# Altium PCB PCB1.PcbDoc (part 2 of 3)
Units mm, origin at the board's own origin, x right, y up, seen from the top; angles counter-clockwise.
Board outline 15.82 x 56.9 mm, 4 copper layers (Top Layer, Layer 1, Layer 2, Bottom Layer), stack 0.576 mm thick; 45 components, 31 nets, 148 pads, 202 vias.
Unrouted connection lines stored in the file: 3.
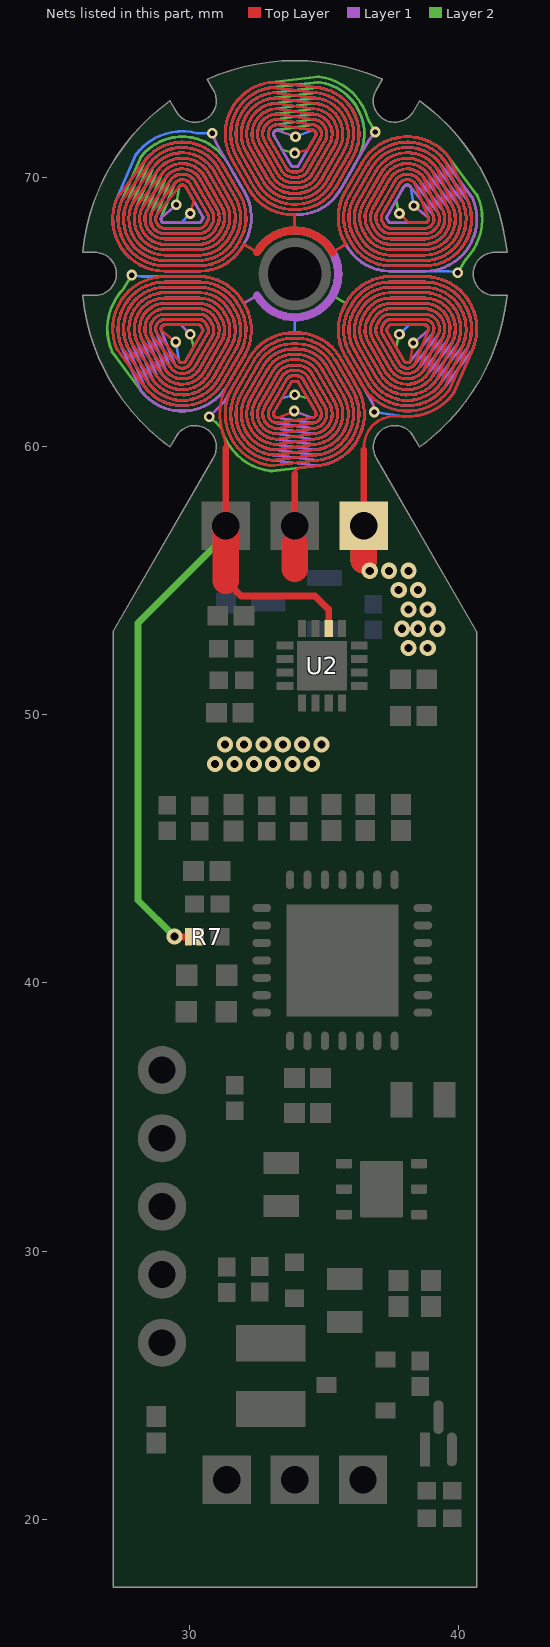
[diagram p4: the nets of this part, all layers, seen from the top]

## Via types
v1: diameter 0.6, hole 0.3, Top Layer to Bottom Layer, tented both sides, 160 vias
v2: diameter 0.5, hole 0.2, Top Layer to Bottom Layer, tented bottom, 20 vias
v3: diameter 0.4, hole 0.2, Top Layer to Bottom Layer, tented both sides, 18 vias
v4: diameter 0.5, hole 0.3, Top Layer to Bottom Layer, tented bottom, 4 vias

## Nets (pads, with @x,y where several pads share a name; then routed paths per layer and width w, separated by ;. In a path a pad name is that pad's centre, name@x,y a point inside that pad or via, vN(x,y) a via of type N, cw(c..) or ccw(c..) an arc to the next point about the centre after c; other vN are vias at no path point) (continued)
NetR7_2: pad.@36.479,57.031 R7.2 U2.10 | length 2482.2
  Top Layer w0.1: 28.319,70.634 27.281,69.232 ccw(c29.07,68.467) 29.07,66.521 30.384,66.521 ccw(c30.346,68.394) 32.004,67.521 32.463,67.256 ; 28.319,70.634 cw(c29.718,69.589) 31.23,70.462 31.889,69.319 cw(c30.419,68.52) 31.831,67.621 cw(c30.346,68.394) 30.389,66.721 29.07,66.721 cw(c29.07,68.467) 27.466,69.156 28.466,70.496 cw(c29.718,69.589) 31.056,70.362 31.718,69.215 cw(c30.419,68.52) 31.705,67.801 ; 28.934,64.321 cw(c29.07,64.375) 29.07,64.521 30.346,64.521 cw(c30.346,64.448) 30.41,64.484 ; 28.939,64.308 v3(29.47,63.887) ; v3(30.012,68.671) 30.14,69.149 29.844,69.662 ccw(c29.718,69.589) 29.603,69.679 29.595,69.668 28.757,68.614 ccw(c29.07,68.467) 29.07,68.121 30.346,68.121 ccw(c30.346,68.394) 30.578,68.25 ; 30.413,64.477 ccw(c30.346,64.448) 30.41,64.483 30.445,64.421 30.482,64.359 ; 30.477,64.366 cw(c30.419,64.322) 30.482,64.359 ; 30.578,64.592 ccw(c33.909,66.421) 30.618,64.521 ccw(c33.909,66.421) 30.66,64.45 ; 30.591,64.568 ccw(c30.346,64.448) 30.578,64.592 ccw(c30.346,64.448) 30.346,64.721 29.07,64.721 ccw(c29.07,64.375) 28.757,64.228 29.595,63.174 29.603,63.163 ccw(c29.718,63.253) 29.844,63.18 30.482,64.286 ccw(c30.419,64.322) 30.482,64.359 ; 30.591,68.274 cw(c30.346,68.394) 30.578,68.25 ; 30.645,64.474 cw(c30.419,64.322) 30.66,64.45 ; 30.645,68.368 ccw(c30.419,68.52) 30.66,68.392 ; 30.751,64.693 ccw(c33.909,66.421) 30.791,64.621 ccw(c33.909,66.421) 30.833,64.55 ; 30.768,64.661 ccw(c30.346,64.448) 30.751,64.693 ccw(c30.346,64.448) 30.346,64.921 29.113,64.921 ccw(c29.07,64.375) 28.583,64.123 29.434,63.056 ccw(c29.718,63.253) 30.017,63.08 30.655,64.186 ccw(c30.419,64.322) 30.66,64.45 ; 30.768,68.181 cw(c30.346,68.394) 30.751,68.149 ; 30.815,64.581 cw(c30.419,64.322) 30.833,64.55 ; 30.815,68.261 ccw(c30.419,68.52) 30.833,68.292 ; 30.945,64.756 ccw(c30.346,64.448) 30.925,64.792 ; 30.945,68.086 cw(c30.346,68.394) 30.925,68.05 ; 30.985,64.686 cw(c30.419,64.322) 31.006,64.651 cw(c30.419,64.322) 31.002,63.986 30.364,62.88 cw(c29.718,63.253) 29.095,62.842 28.224,63.952 cw(c29.07,64.375) 29.063,65.321 30.346,65.321 cw(c30.346,64.448) 31.121,64.851 ; 30.985,68.156 ccw(c30.419,68.52) 31.006,68.191 ; 31.006,64.651 cw(c33.909,66.421) 30.965,64.721 cw(c33.909,66.421) 30.925,64.792 ; 31.099,64.891 ccw(c33.909,66.421) 31.138,64.821 ccw(c33.909,66.421) 31.179,64.752 ; 31.099,67.951 cw(c33.909,66.421) 31.138,68.021 cw(c33.909,66.421) 31.179,68.09 ; 31.121,67.991 cw(c30.346,68.394) 30.346,67.521 29.063,67.521 cw(c29.07,68.467) 28.224,68.89 29.095,70 cw(c29.718,69.589) 30.364,69.962 31.002,68.856 cw(c30.419,68.52) 31.006,68.191 ; 31.155,64.791 cw(c30.419,64.322) 31.175,63.886 30.533,62.774 cw(c29.718,63.253) 28.928,62.732 28.045,63.862 cw(c29.07,64.375) 29.07,65.521 30.346,65.521 cw(c30.346,64.448) 31.273,64.989 ; 31.155,68.051 ccw(c30.419,68.52) 31.175,68.956 30.533,70.068 ccw(c29.718,69.589) 28.928,70.11 28.045,68.98 ccw(c29.07,68.467) 29.07,67.321 30.346,67.321 ccw(c30.346,68.394) 31.273,67.853 ; 31.189,60.652 cw(c33.261,61.207) 31.403,62.28 31.823,63.008 32.06,63.418 ccw(c30.419,64.322) 32.004,65.321 ; 31.193,60.636 31.25,60.4 cw(c30.184,59.969) 31.334,59.938 ; 32.044,65.254 cw(c33.909,66.421) 32.004,65.321 ; 33.241,61.063 cw(c33.261,61.207) 33.135,61.28 33.773,62.386 cw(c33.836,62.349) 33.837,62.422 ; 33.247,61.062 33.285,61.062 v3(33.884,61.31) ; 33.829,63.222 ccw(c33.909,66.421) 33.909,63.221 ccw(c33.909,66.421) 33.989,63.222 ; 33.829,69.62 cw(c33.909,66.421) 33.909,69.621 cw(c33.909,66.421) 33.989,69.62 ; 33.845,62.422 ccw(c33.836,62.349) 33.838,62.422 ; 33.855,62.621 ccw(c33.836,62.349) 33.827,62.622 ; 33.855,70.221 cw(c33.836,70.493) 33.827,70.22 ; 33.863,62.821 ccw(c33.836,62.349) 33.827,62.822 ; 33.863,70.021 cw(c33.836,70.493) 33.827,70.02 ; 33.869,63.021 ccw(c33.836,62.349) 33.827,63.022 ; 33.869,69.821 cw(c33.836,70.493) 33.827,69.82 ; 33.875,63.221 ccw(c33.836,62.349) 33.08,62.786 32.439,61.674 ccw(c33.261,61.207) 33.205,60.263 34.601,60.463 ccw(c34.557,61.207) 35.203,61.58 34.565,62.686 ccw(c33.982,62.349) 33.991,63.022 ; 33.875,69.621 cw(c33.836,70.493) 33.08,70.056 32.439,71.168 cw(c33.261,71.635) 33.205,72.579 34.601,72.379 cw(c34.557,71.635) 35.203,71.262 34.565,70.156 cw(c33.982,70.493) 33.991,69.82 ; 33.909,58.974 cw(c34.136,58.974) 34.136,59.2 34.789,59.275 ccw(c34.557,61.207) 36.242,62.18 35.822,62.908 35.585,63.318 ccw(c33.982,62.349) 33.909,64.221 ; 33.909,68.091 33.909,68.621 cw(c33.836,70.493) 32.233,69.524 31.996,69.934 31.576,70.662 cw(c33.261,71.635) 33.029,73.567 34.762,73.369 ; v3(33.909,70.921) 34.387,71.049 34.683,71.562 ccw(c34.557,71.635) 34.577,71.779 34.564,71.781 33.232,71.979 ccw(c33.261,71.635) 32.962,71.462 33.6,70.356 ccw(c33.836,70.493) 33.827,70.22 ; 33.943,63.221 cw(c33.982,62.349) 34.738,62.786 35.379,61.674 cw(c34.557,61.207) 34.613,60.263 33.194,60.063 cw(c33.261,61.207) 32.269,61.78 32.907,62.886 cw(c33.836,62.349) 33.831,63.422 ; 33.943,69.621 ccw(c33.982,70.493) 34.738,70.056 35.379,71.168 ccw(c34.557,71.635) 34.613,72.579 33.194,72.779 ccw(c33.261,71.635) 32.269,71.062 32.907,69.956 ccw(c33.836,70.493) 33.831,69.42 ; 33.949,63.021 cw(c33.982,62.349) 33.991,63.022 ; 33.949,69.821 ccw(c33.982,70.493) 33.991,69.82 ; 33.955,62.821 cw(c33.982,62.349) 33.991,62.822 ; 33.955,70.021 ccw(c33.982,70.493) 33.991,70.02 ; 33.963,62.621 cw(c33.982,62.349) 33.991,62.622 ; 33.963,70.221 ccw(c33.982,70.493) 33.991,70.22 ; 33.973,62.422 cw(c33.982,62.349) 33.98,62.422 ; 33.988,64.222 cw(c33.909,66.421) 33.909,64.221 ; 34.762,59.473 33.029,59.275 cw(c33.261,61.207) 31.576,62.18 31.996,62.908 32.233,63.318 cw(c33.836,62.349) 33.909,64.221 ; 34.763,59.473 ccw(c34.557,61.207) 36.069,62.08 35.409,63.223 ccw(c33.982,62.349) 33.909,64.021 ccw(c33.836,62.349) 32.409,63.223 31.749,62.08 ccw(c33.261,61.207) 33.056,59.473 34.716,59.67 ccw(c34.557,61.207) 35.895,61.98 35.234,63.127 ccw(c33.982,62.349) 34.002,63.823 ; 34.763,73.369 cw(c34.557,71.635) 36.069,70.762 35.409,69.619 cw(c33.982,70.493) 33.909,68.821 cw(c33.836,70.493) 32.409,69.619 31.749,70.762 cw(c33.261,71.635) 33.056,73.369 34.716,73.172 cw(c34.557,71.635) 35.895,70.862 35.234,69.715 cw(c33.982,70.493) 34.002,69.019 ; 35.355,67.256 35.814,67.521 cw(c37.399,68.52) 35.758,69.424 35.995,69.834 36.415,70.562 cw(c38.1,69.589) 39.658,70.756 40.352,69.156 cw(c38.748,68.467) 38.748,66.721 37.429,66.721 cw(c37.472,68.394) 35.987,67.621 cw(c37.399,68.52) 35.929,69.319 36.588,70.462 cw(c38.1,69.589) 39.499,70.634 40.159,69.098 cw(c38.748,68.467) 38.748,66.921 37.424,66.921 cw(c37.472,68.394) 36.206,67.64 ; 35.852,65.39 cw(c33.909,66.421) 35.814,65.321 ; 36.489,59.866 cw(c37.634,59.969) 37.72,61.116 38.09,61.107 ccw(c38.1,63.253) 39.832,61.986 ; 36.639,64.752 ccw(c33.909,66.421) 36.68,64.821 ccw(c33.909,66.421) 36.719,64.891 ; 36.639,68.09 cw(c33.909,66.421) 36.68,68.021 cw(c33.909,66.421) 36.719,67.951 ; 36.663,64.791 ccw(c37.399,64.322) 36.643,63.886 37.285,62.774 ; 36.663,68.051 cw(c37.399,68.52) 36.643,68.956 37.285,70.068 cw(c38.1,69.589) 38.89,70.11 39.415,68.801 cw(c38.748,68.467) 38.748,67.721 37.472,67.721 cw(c37.472,68.394) 36.893,68.05 ; 36.697,64.851 cw(c37.472,64.448) 37.472,65.321 38.755,65.321 cw(c38.748,64.375) 39.594,63.952 39.057,62.623 cw(c38.1,63.253) 37.108,62.68 36.47,63.786 cw(c37.399,64.322) 36.467,64.854 ; 36.697,67.991 ccw(c37.472,68.394) 37.472,67.521 38.755,67.521 ccw(c38.748,68.467) 39.594,68.89 39.057,70.219 ccw(c38.1,69.589) 37.108,70.162 36.47,69.056 ccw(c37.399,68.52) 36.467,67.988 ; 36.812,64.651 ccw(c33.909,66.421) 36.853,64.721 ccw(c33.909,66.421) 36.893,64.792 ; 36.833,64.686 ccw(c37.399,64.322) 36.812,64.651 ccw(c37.399,64.322) 36.816,63.986 37.454,62.88 ccw(c38.1,63.253) 38.723,62.842 39.235,64.123 ccw(c38.748,64.375) 38.705,64.921 37.472,64.921 ccw(c37.472,64.448) 37.067,64.693 ccw(c37.472,64.448) 37.05,64.661 ; 36.833,68.156 cw(c37.399,68.52) 36.812,68.191 ; 36.873,64.756 cw(c37.472,64.448) 36.893,64.792 ; 36.873,68.086 ccw(c37.472,68.394) 36.893,68.05 ; 37.003,64.581 ccw(c37.399,64.322) 36.985,64.55 ; 37.003,68.261 cw(c37.399,68.52) 36.985,68.292 ; 37.05,68.181 ccw(c37.472,68.394) 37.067,68.149 ; 37.067,64.693 cw(c33.909,66.421) 37.027,64.621 cw(c33.909,66.421) 36.985,64.55 ; 37.173,64.474 ccw(c37.399,64.322) 37.158,64.45 ; 37.173,68.368 cw(c37.399,68.52) 37.158,68.392 ; 37.227,64.568 cw(c37.472,64.448) 37.24,64.592 cw(c37.472,64.448) 37.472,64.721 38.748,64.721 cw(c38.748,64.375) 39.061,64.228 38.562,62.958 cw(c38.1,63.253) 37.606,63.018 36.989,64.086 cw(c37.399,64.322) 36.985,64.55 ; 37.227,68.274 ccw(c37.472,68.394) 37.24,68.25 ccw(c37.472,68.394) 37.472,68.121 38.748,68.121 ccw(c38.748,68.467) 39.061,68.614 38.562,69.884 ccw(c38.1,69.589) 37.606,69.824 36.989,68.756 ccw(c37.399,68.52) 36.985,68.292 ; 37.24,64.592 cw(c33.909,66.421) 37.2,64.521 cw(c33.909,66.421) 37.158,64.45 ; 37.24,68.25 ccw(c33.909,66.421) 37.2,68.321 ccw(c33.909,66.421) 37.158,68.392 ; 37.285,62.774 ccw(c38.1,63.253) 38.89,62.732 39.415,64.041 ccw(c38.748,64.375) 38.748,65.121 37.472,65.121 ccw(c37.472,64.448) 36.893,64.792 ; 37.341,64.366 ccw(c37.399,64.322) 37.336,64.359 ; 37.405,64.477 cw(c37.472,64.448) 37.408,64.483 37.373,64.421 37.336,64.359 ; 37.408,64.484 cw(c37.472,64.448) 37.472,64.521 38.748,64.521 cw(c38.748,64.375) 38.884,64.321 38.879,64.308 38.384,63.056 cw(c38.1,63.253) 37.801,63.08 37.163,64.186 cw(c37.399,64.322) 37.158,64.45 ; 37.429,66.321 37.434,66.321 ; v3(37.806,68.671) 38.156,68.321 38.748,68.321 ccw(c38.748,68.467) 38.884,68.521 38.879,68.534 38.384,69.786 ccw(c38.1,69.589) 37.801,69.762 37.163,68.656 ccw(c37.399,68.52) 37.158,68.392 ; v3(38.323,63.844) 38.215,63.163 cw(c38.1,63.253) 37.974,63.18 37.336,64.286 cw(c37.399,64.322) 37.336,64.359 ; 39.823,61.964 39.832,61.986 ; 39.853,62.015 cw(c38.1,63.253) 39.832,61.986 ; 30.578,68.25 cw(c33.909,66.421) 30.618,68.321 cw(c33.909,66.421) 30.66,68.392 ; 30.66,68.392 ccw(c30.419,68.52) 30.655,68.656 30.017,69.762 ccw(c29.718,69.589) 29.434,69.786 28.583,68.719 ccw(c29.07,68.467) 29.113,67.921 30.346,67.921 ccw(c30.346,68.394) 30.751,68.149 ; 30.751,68.149 cw(c33.909,66.421) 30.791,68.221 cw(c33.909,66.421) 30.833,68.292 ; 30.833,64.55 cw(c30.419,64.322) 30.829,64.086 30.212,63.018 cw(c29.718,63.253) 29.256,62.958 28.403,64.041 cw(c29.07,64.375) 29.07,65.121 30.346,65.121 cw(c30.346,64.448) 30.925,64.792 ; 30.833,68.292 ccw(c30.419,68.52) 30.829,68.756 30.212,69.824 ccw(c29.718,69.589) 29.256,69.884 28.403,68.801 ccw(c29.07,68.467) 29.07,67.721 30.346,67.721 ccw(c30.346,68.394) 30.925,68.05 ; 30.925,68.05 cw(c33.909,66.421) 30.965,68.121 cw(c33.909,66.421) 31.006,68.191 ; 31.273,64.989 ccw(c33.909,66.421) 31.297,64.946 ; 31.273,64.989 cw(c30.346,64.448) 31.297,64.946 ; 31.273,67.853 ccw(c30.346,68.394) 31.297,67.896 ; 31.273,67.853 cw(c33.909,66.421) 31.297,67.896 ; 31.297,64.946 ccw(c33.909,66.421) 31.311,64.921 ccw(c33.909,66.421) 31.326,64.896 ; 31.297,67.896 cw(c33.909,66.421) 31.311,67.921 cw(c33.909,66.421) 31.326,67.946 ; 31.326,64.896 ccw(c33.909,66.421) 31.351,64.854 ; 31.326,64.896 cw(c30.419,64.322) 31.351,64.854 ; 31.326,67.946 cw(c33.909,66.421) 31.351,67.988 ; 31.326,67.946 ccw(c30.419,68.52) 31.351,67.988 ; 31.351,64.854 cw(c30.419,64.322) 31.348,63.786 30.71,62.68 cw(c29.718,63.253) 28.761,62.623 27.853,63.8 cw(c29.07,64.375) 29.07,65.721 30.398,65.721 cw(c30.346,64.448) 31.436,65.109 ccw(c33.909,66.421) 31.484,65.021 cw(c30.419,64.322) 31.547,63.73 30.883,62.58 cw(c29.718,63.253) 28.611,62.487 27.659,63.744 cw(c29.07,64.375) 29.07,65.921 30.394,65.921 cw(c30.346,64.448) 31.612,65.202 ccw(c33.909,66.421) 31.657,65.121 ; 31.351,67.988 ccw(c30.419,68.52) 31.348,69.056 30.71,70.162 ccw(c29.718,69.589) 28.761,70.219 27.853,69.042 ccw(c29.07,68.467) 29.07,67.121 30.398,67.121 ccw(c30.346,68.394) 31.436,67.733 cw(c33.909,66.421) 31.484,67.821 ccw(c30.419,68.52) 31.547,69.112 30.883,70.262 ccw(c29.718,69.589) 28.611,70.355 27.659,69.098 ccw(c29.07,68.467) 29.07,66.921 30.394,66.921 ccw(c30.346,68.394) 31.612,67.64 cw(c33.909,66.421) 31.657,67.721 ; 31.657,65.121 ccw(c33.909,66.421) 31.705,65.041 ; 31.657,65.121 cw(c30.419,64.322) 31.705,65.041 ; 31.657,67.721 ccw(c30.419,68.52) 31.705,67.801 ; 31.657,67.721 cw(c33.909,66.421) 31.705,67.801 ; 31.705,65.041 cw(c30.419,64.322) 31.718,63.627 31.056,62.48 cw(c29.718,63.253) 28.466,62.346 27.466,63.686 cw(c29.07,64.375) 29.07,66.121 30.389,66.121 cw(c30.346,64.448) 31.831,65.221 cw(c30.419,64.322) 31.889,63.523 31.23,62.38 cw(c29.718,63.253) 28.319,62.208 27.281,63.61 cw(c29.07,64.375) 29.07,66.321 30.384,66.321 cw(c30.346,64.448) 32.004,65.321 ; 33.827,62.622 ccw(c33.909,66.421) 33.909,62.621 ccw(c33.909,66.421) 33.991,62.622 ; 33.827,62.622 ccw(c33.836,62.349) 33.6,62.486 32.962,61.38 ccw(c33.261,61.207) 33.232,60.863 34.564,61.061 34.577,61.063 ccw(c34.557,61.207) 34.683,61.28 34.045,62.386 ccw(c33.982,62.349) 33.981,62.422 ; 33.827,62.822 ccw(c33.909,66.421) 33.909,62.821 ccw(c33.909,66.421) 33.991,62.822 ; 33.827,62.822 ccw(c33.836,62.349) 33.427,62.586 32.81,61.518 ccw(c33.261,61.207) 33.236,60.66 34.586,60.863 ccw(c34.557,61.207) 34.856,61.38 34.218,62.486 ccw(c33.982,62.349) 33.991,62.622 ; 33.827,63.022 ccw(c33.909,66.421) 33.909,63.021 ccw(c33.909,66.421) 33.991,63.022 ; 33.827,63.022 ccw(c33.836,62.349) 33.253,62.686 32.615,61.58 ccw(c33.261,61.207) 33.217,60.463 34.582,60.66 ccw(c34.557,61.207) 35.008,61.518 34.391,62.586 ccw(c33.982,62.349) 33.991,62.822 ; 33.827,69.82 cw(c33.909,66.421) 33.909,69.821 cw(c33.909,66.421) 33.991,69.82 ; 33.827,69.82 cw(c33.836,70.493) 33.253,70.156 32.615,71.262 cw(c33.261,71.635) 33.217,72.379 34.582,72.182 cw(c34.557,71.635) 35.008,71.324 34.391,70.256 cw(c33.982,70.493) 33.991,70.02 ; 33.827,70.02 cw(c33.836,70.493) 33.427,70.256 32.81,71.324 cw(c33.261,71.635) 33.236,72.182 34.586,71.979 cw(c34.557,71.635) 34.856,71.462 34.218,70.356 cw(c33.982,70.493) 33.991,70.22 ; 33.827,70.02 cw(c33.909,66.421) 33.909,70.021 cw(c33.909,66.421) 33.991,70.02 ; 33.827,70.22 cw(c33.909,66.421) 33.909,70.221 cw(c33.909,66.421) 33.991,70.22 ; 33.831,63.422 cw(c33.836,62.349) 33.88,63.421 ; 33.831,63.422 ccw(c33.909,66.421) 33.88,63.421 ; 33.831,69.42 ccw(c33.836,70.493) 33.88,69.421 ; 33.831,69.42 cw(c33.909,66.421) 33.88,69.421 ; 33.838,62.422 33.909,62.421 33.98,62.422 ; 33.88,63.421 ccw(c33.909,66.421) 33.909,63.421 ccw(c33.909,66.421) 33.938,63.421 ; 33.88,69.421 cw(c33.909,66.421) 33.909,69.421 cw(c33.909,66.421) 33.938,69.421 ; 33.909,63.821 cw(c33.982,62.349) 34.002,63.823 ; 33.909,63.821 ccw(c33.909,66.421) 34.002,63.823 ; 33.909,63.821 cw(c33.909,66.421) 33.816,63.823 ccw(c33.836,62.349) 32.584,63.127 31.923,61.98 ccw(c33.261,61.207) 33.102,59.67 34.667,59.866 ccw(c34.557,61.207) 35.722,61.88 35.058,63.03 ccw(c33.982,62.349) 33.909,63.621 cw(c33.909,66.421) 33.809,63.623 ccw(c33.836,62.349) 32.76,63.03 32.096,61.88 ccw(c33.261,61.207) 33.151,59.866 34.624,60.063 ccw(c34.557,61.207) 35.549,61.78 34.911,62.886 ccw(c33.982,62.349) 33.987,63.422 ; 33.909,69.021 cw(c33.909,66.421) 34.002,69.019 ; 33.909,69.021 ccw(c33.982,70.493) 34.002,69.019 ; 33.909,69.021 ccw(c33.909,66.421) 33.816,69.019 cw(c33.836,70.493) 32.584,69.715 31.923,70.862 cw(c33.261,71.635) 33.102,73.172 34.667,72.976 cw(c34.557,71.635) 35.722,70.962 35.058,69.812 cw(c33.982,70.493) 33.909,69.221 ccw(c33.909,66.421) 33.809,69.219 cw(c33.836,70.493) 32.76,69.812 32.096,70.962 cw(c33.261,71.635) 33.151,72.976 34.624,72.779 cw(c34.557,71.635) 35.549,71.062 34.911,69.956 cw(c33.982,70.493) 33.987,69.42 ; 33.938,63.421 cw(c33.982,62.349) 33.987,63.422 ; 33.938,63.421 ccw(c33.909,66.421) 33.987,63.422 ; 33.938,69.421 cw(c33.909,66.421) 33.987,69.42 ; 33.938,69.421 ccw(c33.982,70.493) 33.987,69.42 ; 35.814,65.321 cw(c37.472,64.448) 37.429,66.321 cw(c37.472,64.448) 37.434,66.321 ; 35.814,65.321 ccw(c37.399,64.322) 35.758,63.418 35.995,63.008 36.415,62.28 ccw(c38.1,63.253) 39.658,62.086 40.352,63.686 ccw(c38.748,64.375) 38.748,66.121 37.429,66.121 ccw(c37.472,64.448) 35.987,65.221 ccw(c37.399,64.322) 35.929,63.523 36.588,62.38 ccw(c38.1,63.253) 39.499,62.208 40.159,63.744 ccw(c38.748,64.375) 38.748,65.921 37.424,65.921 ccw(c37.472,64.448) 36.206,65.202 ; 36.161,65.121 cw(c37.472,64.448) 36.206,65.202 ; 36.161,65.121 ccw(c33.909,66.421) 36.206,65.202 ; 36.161,65.121 cw(c33.909,66.421) 36.113,65.041 ccw(c37.399,64.322) 36.1,63.627 36.762,62.48 ccw(c38.1,63.253) 39.352,62.346 39.965,63.8 ccw(c38.748,64.375) 38.748,65.721 37.42,65.721 ccw(c37.472,64.448) 36.334,65.021 cw(c33.909,66.421) 36.282,64.935 ccw(c37.399,64.322) 36.271,63.73 36.935,62.58 ccw(c38.1,63.253) 39.207,62.487 39.773,63.862 ccw(c38.748,64.375) 38.748,65.521 37.472,65.521 ccw(c37.472,64.448) 36.545,64.989 ; 36.161,67.721 cw(c33.909,66.421) 36.206,67.64 ; 36.161,67.721 ccw(c37.472,68.394) 36.206,67.64 ; 36.161,67.721 ccw(c33.909,66.421) 36.113,67.801 cw(c37.399,68.52) 36.1,69.215 36.762,70.362 cw(c38.1,69.589) 39.352,70.496 39.965,69.042 cw(c38.748,68.467) 38.748,67.121 37.42,67.121 cw(c37.472,68.394) 36.334,67.821 ccw(c33.909,66.421) 36.282,67.907 cw(c37.399,68.52) 36.271,69.112 36.935,70.262 cw(c38.1,69.589) 39.207,70.355 39.773,68.98 cw(c38.748,68.467) 38.748,67.321 37.472,67.321 cw(c37.472,68.394) 36.545,67.853 ; 36.467,64.854 cw(c37.399,64.322) 36.492,64.896 ; 36.467,64.854 ccw(c33.909,66.421) 36.492,64.896 ; 36.467,67.988 ccw(c37.399,68.52) 36.492,67.946 ; 36.467,67.988 cw(c33.909,66.421) 36.492,67.946 ; 36.492,64.896 ccw(c33.909,66.421) 36.507,64.921 ccw(c33.909,66.421) 36.521,64.946 ; 36.492,67.946 cw(c33.909,66.421) 36.507,67.921 cw(c33.909,66.421) 36.521,67.896 ; 36.521,64.946 ccw(c33.909,66.421) 36.545,64.989 ; 36.521,64.946 cw(c37.472,64.448) 36.545,64.989 ; 36.521,67.896 ccw(c37.472,68.394) 36.545,67.853 ; 36.521,67.896 cw(c33.909,66.421) 36.545,67.853 ; 36.812,68.191 cw(c33.909,66.421) 36.853,68.121 cw(c33.909,66.421) 36.893,68.05 ; 36.812,68.191 cw(c37.399,68.52) 36.816,68.856 37.454,69.962 cw(c38.1,69.589) 38.723,70 39.235,68.719 cw(c38.748,68.467) 38.705,67.921 37.472,67.921 cw(c37.472,68.394) 37.067,68.149 ; 36.985,68.292 cw(c33.909,66.421) 37.027,68.221 cw(c33.909,66.421) 37.067,68.149 ; 37.434,66.321 38.748,66.321 cw(c38.748,64.375) 40.537,63.61 39.832,61.986
  Top Layer w0.25: v1@29.435,41.714 R7.2@30.168,41.714 ; 31.339,54.989 31.908,54.421 34.668,54.421 35.148,53.941 35.175,53.941 U2.10@35.175,53.201 ; 33.909,56.346 33.909,57.031
  Top Layer w0.254: 31.339,57.031 31.339,59.938 ; 33.909,57.031 33.909,58.974 ; pad.@36.479,57.031 36.479,59.866
  Top Layer w0.3: 32.506,67.231 cw(c33.909,66.421) 35.322,67.214
  Top Layer w1: 31.339,54.989 31.339,57.031 ; 33.909,55.431 33.909,56.346 ; 36.479,55.757 pad.@36.479,57.031
  Layer 1 w0.1: 28.319,70.634 27.281,69.232 ccw(c29.07,68.467) 29.07,66.521 30.384,66.521 ccw(c30.346,68.394) 32.004,67.521 ; 28.319,70.634 cw(c29.718,69.589) 31.23,70.462 31.889,69.319 cw(c30.419,68.52) 31.831,67.621 cw(c30.346,68.394) 30.389,66.721 29.07,66.721 cw(c29.07,68.467) 27.466,69.156 28.466,70.496 cw(c29.718,69.589) 31.056,70.362 31.718,69.215 cw(c30.419,68.52) 31.705,67.801 ; v3(29.495,68.998) 28.934,68.521 ccw(c29.07,68.467) 29.07,68.321 30.346,68.321 ccw(c30.346,68.394) 30.41,68.358 ; v3(30.012,64.171) 29.662,64.521 29.07,64.521 ccw(c29.07,64.375) 28.934,64.321 28.939,64.308 29.434,63.056 ccw(c29.718,63.253) 30.017,63.08 30.655,64.186 ccw(c30.419,64.322) 30.66,64.45 ; 30.413,68.365 cw(c30.346,68.394) 30.41,68.358 ; 30.477,68.476 ccw(c30.419,68.52) 30.482,68.483 ; 30.578,64.592 ccw(c33.909,66.421) 30.618,64.521 ccw(c33.909,66.421) 30.66,64.45 ; 30.591,64.568 ccw(c30.346,64.448) 30.578,64.592 ccw(c30.346,64.448) 30.346,64.721 29.07,64.721 ccw(c29.07,64.375) 28.757,64.228 29.256,62.958 ccw(c29.718,63.253) 30.212,63.018 30.829,64.086 ccw(c30.419,64.322) 30.833,64.55 ; 30.591,68.274 cw(c30.346,68.394) 30.578,68.25 ; 30.645,64.474 cw(c30.419,64.322) 30.66,64.45 ; 30.645,68.368 ccw(c30.419,68.52) 30.66,68.392 ; v3(30.723,61.1) 31.256,61.627 31.677,62.354 ; 30.751,64.693 ccw(c33.909,66.421) 30.791,64.621 ccw(c33.909,66.421) 30.833,64.55 ; 30.768,64.661 ccw(c30.346,64.448) 30.751,64.693 ccw(c30.346,64.448) 30.346,64.921 29.113,64.921 ccw(c29.07,64.375) 28.583,64.123 29.095,62.842 ccw(c29.718,63.253) 30.364,62.88 31.002,63.986 ccw(c30.419,64.322) 31.006,64.651 ccw(c30.419,64.322) 30.985,64.686 ; 30.768,68.181 cw(c30.346,68.394) 30.751,68.149 ; 30.815,64.581 cw(c30.419,64.322) 30.833,64.55 ; 30.815,68.261 ccw(c30.419,68.52) 30.833,68.292 ; v3(30.832,71.661) 30.983,71.289 31.403,70.562 31.823,69.834 32.06,69.424 cw(c30.419,68.52) 32.004,67.521 ; 30.945,64.756 ccw(c30.346,64.448) 30.925,64.792 ; 30.945,68.086 cw(c30.346,68.394) 30.925,68.05 ; 30.985,68.156 ccw(c30.419,68.52) 31.006,68.191 ; 31.006,64.651 cw(c33.909,66.421) 30.965,64.721 cw(c33.909,66.421) 30.925,64.792 ; 31.099,64.891 ccw(c33.909,66.421) 31.138,64.821 ccw(c33.909,66.421) 31.179,64.752 ; 31.099,67.951 cw(c33.909,66.421) 31.138,68.021 cw(c33.909,66.421) 31.179,68.09 ; 31.121,64.851 ccw(c30.346,64.448) 30.346,65.321 29.063,65.321 ccw(c29.07,64.375) 28.224,63.952 28.761,62.623 ccw(c29.718,63.253) 30.71,62.68 31.348,63.786 ccw(c30.419,64.322) 31.351,64.854 ; 31.121,67.991 cw(c30.346,68.394) 30.346,67.521 29.063,67.521 cw(c29.07,68.467) 28.224,68.89 29.095,70 cw(c29.718,69.589) 30.364,69.962 31.002,68.856 cw(c30.419,68.52) 31.006,68.191 ; 31.155,64.791 cw(c30.419,64.322) 31.175,63.886 30.533,62.774 cw(c29.718,63.253) 28.928,62.732 28.403,64.041 cw(c29.07,64.375) 29.07,65.121 30.346,65.121 cw(c30.346,64.448) 30.925,64.792 ; 31.155,68.051 ccw(c30.419,68.52) 31.175,68.956 30.533,70.068 ccw(c29.718,69.589) 28.928,70.11 28.045,68.98 ccw(c29.07,68.467) 29.07,67.321 30.346,67.321 ccw(c30.346,68.394) 31.273,67.853 ; 31.576,62.18 31.996,62.908 32.233,63.318 cw(c33.836,62.349) 33.909,64.221 ; 32.044,67.588 ccw(c33.909,66.421) 32.004,67.521 ; 32.463,65.586 32.004,65.321 cw(c30.419,64.322) 32.06,63.418 31.823,63.008 31.403,62.28 cw(c29.718,63.253) 28.16,62.086 27.466,63.686 cw(c29.07,64.375) 29.07,66.121 30.389,66.121 cw(c30.346,64.448) 31.831,65.221 cw(c30.419,64.322) 31.889,63.523 31.23,62.38 cw(c29.718,63.253) 28.319,62.208 27.659,63.744 cw(c29.07,64.375) 29.07,65.921 30.394,65.921 cw(c30.346,64.448) 31.612,65.202 ; 33.055,59.473 cw(c33.261,61.207) 31.749,62.08 32.409,63.223 cw(c33.836,62.349) 33.909,64.021 cw(c33.982,62.349) 35.409,63.223 36.069,62.08 cw(c34.557,61.207) 34.762,59.473 33.102,59.67 cw(c33.261,61.207) 31.923,61.98 32.584,63.127 cw(c33.836,62.349) 33.816,63.823 ; 33.056,59.473 34.789,59.275 ccw(c34.557,61.207) 36.242,62.18 35.822,62.908 35.585,63.318 ccw(c33.982,62.349) 33.909,64.221 ; 33.241,71.779 ccw(c33.261,71.635) 33.135,71.562 33.773,70.456 ccw(c33.836,70.493) 33.837,70.42 ; 33.247,71.78 v3(33.934,71.532) ; 33.829,63.222 ccw(c33.909,66.421) 33.909,63.221 ccw(c33.909,66.421) 33.989,63.222 ; 33.829,69.62 cw(c33.909,66.421) 33.909,69.621 cw(c33.909,66.421) 33.989,69.62 ; 33.83,64.222 ccw(c33.909,66.421) 33.909,64.221 ; 33.845,62.422 ccw(c33.836,62.349) 33.838,62.422 ; 33.845,70.42 cw(c33.836,70.493) 33.838,70.42 ; 33.855,62.621 ccw(c33.836,62.349) 33.827,62.622 ; 33.855,70.221 cw(c33.836,70.493) 33.827,70.22 ; 33.863,62.821 ccw(c33.836,62.349) 33.827,62.822 ; 33.863,70.021 cw(c33.836,70.493) 33.827,70.02 ; 33.869,63.021 ccw(c33.836,62.349) 33.827,63.022 ; 33.869,69.821 cw(c33.836,70.493) 33.827,69.82 ; 33.875,63.221 ccw(c33.836,62.349) 33.08,62.786 32.439,61.674 ccw(c33.261,61.207) 33.205,60.263 34.624,60.063 ccw(c34.557,61.207) 35.549,61.78 34.911,62.886 ccw(c33.982,62.349) 33.987,63.422 ; 33.875,69.621 cw(c33.836,70.493) 33.08,70.056 32.439,71.168 cw(c33.261,71.635) 33.205,72.579 34.601,72.379 cw(c34.557,71.635) 35.203,71.262 34.565,70.156 cw(c33.982,70.493) 33.991,69.82 ; v3(33.884,61.31) 34.571,61.062 ; 33.943,63.221 cw(c33.982,62.349) 34.738,62.786 35.379,61.674 cw(c34.557,61.207) 34.613,60.263 33.217,60.463 cw(c33.261,61.207) 32.615,61.58 33.253,62.686 cw(c33.836,62.349) 33.827,63.022 ; 33.943,69.621 ccw(c33.982,70.493) 34.738,70.056 35.379,71.168 ccw(c34.557,71.635) 34.613,72.579 33.194,72.779 ccw(c33.261,71.635) 32.269,71.062 32.907,69.956 ccw(c33.836,70.493) 33.831,69.42 ; 33.949,63.021 cw(c33.982,62.349) 33.991,63.022 ; 33.949,69.821 ccw(c33.982,70.493) 33.991,69.82 ; 33.955,62.821 cw(c33.982,62.349) 33.991,62.822 ; 33.955,70.021 ccw(c33.982,70.493) 33.991,70.02 ; 33.963,62.621 cw(c33.982,62.349) 33.991,62.622 ; 33.963,70.221 ccw(c33.982,70.493) 33.991,70.22 ; 33.973,62.422 cw(c33.982,62.349) 33.98,62.422 ; 33.973,70.42 ccw(c33.982,70.493) 33.98,70.42 ; 33.988,68.62 ccw(c33.909,66.421) 33.909,68.621 ; 34.577,61.063 ccw(c34.557,61.207) 34.683,61.28 34.045,62.386 ccw(c33.982,62.349) 33.981,62.422 ; 34.762,73.369 33.029,73.567 ccw(c33.261,71.635) 31.576,70.662 31.996,69.934 32.233,69.524 ccw(c33.836,70.493) 33.909,68.621 ; 34.763,73.369 cw(c34.557,71.635) 36.069,70.762 35.409,69.619 cw(c33.982,70.493) 33.909,68.821 cw(c33.836,70.493) 32.409,69.619 31.749,70.762 cw(c33.261,71.635) 33.056,73.369 34.716,73.172 cw(c34.557,71.635) 35.895,70.862 35.234,69.715 cw(c33.982,70.493) 34.002,69.019 ; 35.355,67.256 35.814,67.521 ccw(c37.472,68.394) 37.434,66.521 38.748,66.521 ccw(c38.748,68.467) 40.537,69.232 39.499,70.634 ; 35.774,65.254 ccw(c33.909,66.421) 35.814,65.321 ; 36.639,64.752 ccw(c33.909,66.421) 36.68,64.821 ccw(c33.909,66.421) 36.719,64.891 ; 36.639,68.09 cw(c33.909,66.421) 36.68,68.021 cw(c33.909,66.421) 36.719,67.951 ; 36.663,64.791 ccw(c37.399,64.322) 36.643,63.886 37.285,62.774 ccw(c38.1,63.253) 38.89,62.732 39.773,63.862 ccw(c38.748,64.375) 38.748,65.521 37.472,65.521 ccw(c37.472,64.448) 36.545,64.989 ; 36.663,68.051 cw(c37.399,68.52) 36.643,68.956 37.285,70.068 ; 36.697,64.851 cw(c37.472,64.448) 37.472,65.321 38.755,65.321 cw(c38.748,64.375) 39.594,63.952 38.723,62.842 cw(c38.1,63.253) 37.454,62.88 36.816,63.986 cw(c37.399,64.322) 36.812,64.651 cw(c37.399,64.322) 36.833,64.686 ; 36.697,67.991 ccw(c37.472,68.394) 37.472,67.521 38.755,67.521 ccw(c38.748,68.467) 39.594,68.89 38.723,70 ccw(c38.1,69.589) 37.454,69.962 36.816,68.856 ccw(c37.399,68.52) 36.812,68.191 ; 36.812,64.651 ccw(c33.909,66.421) 36.853,64.721 ccw(c33.909,66.421) 36.893,64.792 ; 36.833,68.156 cw(c37.399,68.52) 36.812,68.191 ; v3(36.87,61.276) 36.835,61.553 36.415,62.28 35.995,63.008 35.758,63.418 cw(c37.399,64.322) 35.814,65.321 ; 36.873,64.756 cw(c37.472,64.448) 36.893,64.792 ; 36.873,68.086 ccw(c37.472,68.394) 36.893,68.05 ; v3(36.908,71.706) 36.662,71.389 36.242,70.662 35.822,69.934 35.585,69.524 cw(c33.982,70.493) 33.909,68.621 ; 37.003,64.581 ccw(c37.399,64.322) 36.985,64.55 ; 37.003,68.261 cw(c37.399,68.52) 36.985,68.292 ; 37.05,64.661 cw(c37.472,64.448) 37.067,64.693 cw(c37.472,64.448) 37.472,64.921 38.705,64.921 cw(c38.748,64.375) 39.235,64.123 38.384,63.056 cw(c38.1,63.253) 37.801,63.08 37.163,64.186 cw(c37.399,64.322) 37.158,64.45 ; 37.05,68.181 ccw(c37.472,68.394) 37.067,68.149 ; 37.067,64.693 cw(c33.909,66.421) 37.027,64.621 cw(c33.909,66.421) 36.985,64.55 ; 37.173,64.474 ccw(c37.399,64.322) 37.158,64.45 ; 37.173,68.368 cw(c37.399,68.52) 37.158,68.392 ; 37.227,64.568 cw(c37.472,64.448) 37.24,64.592 cw(c37.472,64.448) 37.472,64.721 38.748,64.721 cw(c38.748,64.375) 39.061,64.228 38.223,63.174 38.215,63.163 cw(c38.1,63.253) 37.974,63.18 37.336,64.286 cw(c37.399,64.322) 37.336,64.359 ; 37.227,68.274 ccw(c37.472,68.394) 37.24,68.25 ccw(c37.472,68.394) 37.472,68.121 38.748,68.121 ccw(c38.748,68.467) 39.061,68.614 38.223,69.668 38.215,69.679 ccw(c38.1,69.589) 37.974,69.662 37.336,68.556 ccw(c37.399,68.52) 37.336,68.483 ; 37.24,64.592 cw(c33.909,66.421) 37.2,64.521 cw(c33.909,66.421) 37.158,64.45 ; 37.24,68.25 ccw(c33.909,66.421) 37.2,68.321 ccw(c33.909,66.421) 37.158,68.392 ; 37.285,70.068 cw(c38.1,69.589) 38.89,70.11 39.773,68.98 cw(c38.748,68.467) 38.748,67.321 37.472,67.321 cw(c37.472,68.394) 36.545,67.853 ; 37.341,64.366 ccw(c37.399,64.322) 37.336,64.359 ; 37.341,68.476 cw(c37.399,68.52) 37.336,68.483 ; 37.405,64.477 cw(c37.472,64.448) 37.408,64.484 ; 37.405,68.365 ccw(c37.472,68.394) 37.408,68.359 ; v3(38.323,63.844) 38.884,64.321 ccw(c38.748,64.375) 38.748,64.521 37.472,64.521 ccw(c37.472,64.448) 37.408,64.484 ; v3(38.348,68.955) 38.879,68.534 ; 38.884,68.521 cw(c38.748,68.467) 38.748,68.321 37.472,68.321 cw(c37.472,68.394) 37.408,68.358 ; 39.499,70.634 ccw(c38.1,69.589) 36.588,70.462 35.929,69.319 ccw(c37.399,68.52) 35.987,67.621 ccw(c37.472,68.394) 37.429,66.721 38.748,66.721 ccw(c38.748,68.467) 40.352,69.156 39.352,70.496 ccw(c38.1,69.589) 36.762,70.362 36.1,69.215 ccw(c37.399,68.52) 36.113,67.801 ; 30.41,68.358 30.445,68.421 30.482,68.483 ; 30.482,68.483 ccw(c30.419,68.52) 30.482,68.556 29.844,69.662 ccw(c29.718,69.589) 29.603,69.679 29.595,69.668 28.757,68.614 ccw(c29.07,68.467) 29.07,68.121 30.346,68.121 ccw(c30.346,68.394) 30.578,68.25 ; 30.578,68.25 cw(c33.909,66.421) 30.618,68.321 cw(c33.909,66.421) 30.66,68.392 ; 30.66,68.392 ccw(c30.419,68.52) 30.655,68.656 30.017,69.762 ccw(c29.718,69.589) 29.434,69.786 28.583,68.719 ccw(c29.07,68.467) 29.113,67.921 30.346,67.921 ccw(c30.346,68.394) 30.751,68.149 ; 30.751,68.149 cw(c33.909,66.421) 30.791,68.221 cw(c33.909,66.421) 30.833,68.292 ; 30.833,68.292 ccw(c30.419,68.52) 30.829,68.756 30.212,69.824 ccw(c29.718,69.589) 29.256,69.884 28.403,68.801 ccw(c29.07,68.467) 29.07,67.721 30.346,67.721 ccw(c30.346,68.394) 30.925,68.05 ; 30.925,68.05 cw(c33.909,66.421) 30.965,68.121 cw(c33.909,66.421) 31.006,68.191 ; 31.273,64.989 ccw(c33.909,66.421) 31.297,64.946 ; 31.273,64.989 cw(c30.346,64.448) 31.297,64.946 ; 31.273,64.989 ccw(c30.346,64.448) 30.346,65.521 29.07,65.521 ccw(c29.07,64.375) 28.045,63.862 28.611,62.487 ccw(c29.718,63.253) 30.883,62.58 31.547,63.73 ccw(c30.419,64.322) 31.536,64.935 cw(c33.909,66.421) 31.484,65.021 ccw(c30.346,64.448) 30.398,65.721 29.07,65.721 ccw(c29.07,64.375) 27.853,63.8 28.466,62.346 ccw(c29.718,63.253) 31.056,62.48 31.718,63.627 ccw(c30.419,64.322) 31.705,65.041 cw(c33.909,66.421) 31.657,65.121 ; 31.273,67.853 ccw(c30.346,68.394) 31.297,67.896 ; 31.273,67.853 cw(c33.909,66.421) 31.297,67.896 ; 31.297,64.946 ccw(c33.909,66.421) 31.311,64.921 ccw(c33.909,66.421) 31.326,64.896 ; 31.297,67.896 cw(c33.909,66.421) 31.311,67.921 cw(c33.909,66.421) 31.326,67.946 ; 31.326,64.896 cw(c30.419,64.322) 31.351,64.854 ; 31.326,64.896 ccw(c33.909,66.421) 31.351,64.854 ; 31.326,67.946 cw(c33.909,66.421) 31.351,67.988 ; 31.326,67.946 ccw(c30.419,68.52) 31.351,67.988 ; 31.351,67.988 ccw(c30.419,68.52) 31.348,69.056 30.71,70.162 ccw(c29.718,69.589) 28.761,70.219 27.853,69.042 ccw(c29.07,68.467) 29.07,67.121 30.398,67.121 ccw(c30.346,68.394) 31.436,67.733 cw(c33.909,66.421) 31.484,67.821 ccw(c30.419,68.52) 31.547,69.112 30.883,70.262 ccw(c29.718,69.589) 28.611,70.355 27.659,69.098 ccw(c29.07,68.467) 29.07,66.921 30.394,66.921 ccw(c30.346,68.394) 31.612,67.64 cw(c33.909,66.421) 31.657,67.721 ; 31.612,65.202 cw(c30.346,64.448) 31.657,65.121 ; 31.612,65.202 ccw(c33.909,66.421) 31.657,65.121 ; 31.657,67.721 ccw(c30.419,68.52) 31.705,67.801 ; 31.657,67.721 cw(c33.909,66.421) 31.705,67.801 ; 33.816,63.823 cw(c33.836,62.349) 33.909,63.821 ; 33.816,63.823 ccw(c33.909,66.421) 33.909,63.821 ; 33.827,62.622 ccw(c33.909,66.421) 33.909,62.621 ccw(c33.909,66.421) 33.991,62.622 ; 33.827,62.622 ccw(c33.836,62.349) 33.6,62.486 32.962,61.38 ccw(c33.261,61.207) 33.232,60.863 34.582,60.66 ccw(c34.557,61.207) 35.008,61.518 34.391,62.586 ccw(c33.982,62.349) 33.991,62.822 ; 33.827,62.822 ccw(c33.909,66.421) 33.909,62.821 ccw(c33.909,66.421) 33.991,62.822 ; 33.827,62.822 ccw(c33.836,62.349) 33.427,62.586 32.81,61.518 ccw(c33.261,61.207) 33.236,60.66 34.601,60.463 ccw(c34.557,61.207) 35.203,61.58 34.565,62.686 ccw(c33.982,62.349) 33.991,63.022 ; 33.827,63.022 ccw(c33.909,66.421) 33.909,63.021 ccw(c33.909,66.421) 33.991,63.022 ; 33.827,69.82 cw(c33.909,66.421) 33.909,69.821 cw(c33.909,66.421) 33.991,69.82 ; 33.827,69.82 cw(c33.836,70.493) 33.253,70.156 32.615,71.262 cw(c33.261,71.635) 33.217,72.379 34.582,72.182 cw(c34.557,71.635) 35.008,71.324 34.391,70.256 cw(c33.982,70.493) 33.991,70.02 ; 33.827,70.02 cw(c33.836,70.493) 33.427,70.256 32.81,71.324 cw(c33.261,71.635) 33.236,72.182 34.586,71.979 cw(c34.557,71.635) 34.856,71.462 34.218,70.356 cw(c33.982,70.493) 33.991,70.22 ; 33.827,70.02 cw(c33.909,66.421) 33.909,70.021 cw(c33.909,66.421) 33.991,70.02 ; 33.827,70.22 cw(c33.909,66.421) 33.909,70.221 cw(c33.909,66.421) 33.991,70.22 ; 33.827,70.22 cw(c33.836,70.493) 33.6,70.356 32.962,71.462 cw(c33.261,71.635) 33.232,71.979 34.564,71.781 34.577,71.779 cw(c34.557,71.635) 34.683,71.562 34.045,70.456 cw(c33.982,70.493) 33.981,70.42 ; 33.831,63.422 cw(c33.836,62.349) 33.88,63.421 ; 33.831,63.422 ccw(c33.909,66.421) 33.88,63.421 ; 33.831,63.422 ccw(c33.836,62.349) 32.907,62.886 32.269,61.78 ccw(c33.261,61.207) 33.194,60.063 34.667,59.866 ccw(c34.557,61.207) 35.722,61.88 35.058,63.03 ccw(c33.982,62.349) 34.009,63.623 cw(c33.909,66.421) 33.909,63.621 ccw(c33.836,62.349) 32.76,63.03 32.096,61.88 ccw(c33.261,61.207) 33.151,59.866 34.716,59.67 ccw(c34.557,61.207) 35.895,61.98 35.234,63.127 ccw(c33.982,62.349) 34.002,63.823 cw(c33.909,66.421) 33.909,63.821 ; 33.831,69.42 ccw(c33.836,70.493) 33.88,69.421 ; 33.831,69.42 cw(c33.909,66.421) 33.88,69.421 ; 33.837,62.422 ccw(c33.836,62.349) 33.773,62.386 33.135,61.28 ccw(c33.261,61.207) 33.241,61.063 33.254,61.061 34.586,60.863 ccw(c34.557,61.207) 34.856,61.38 34.218,62.486 ccw(c33.982,62.349) 33.991,62.622 ; 33.838,62.422 33.909,62.421 33.98,62.422 ; 33.838,70.42 33.909,70.421 33.98,70.42 ; 33.88,63.421 ccw(c33.909,66.421) 33.909,63.421 ccw(c33.909,66.421) 33.938,63.421 ; 33.88,69.421 cw(c33.909,66.421) 33.909,69.421 cw(c33.909,66.421) 33.938,69.421 ; 33.909,69.021 cw(c33.909,66.421) 34.002,69.019 ; 33.909,69.021 ccw(c33.982,70.493) 34.002,69.019 ; 33.909,69.021 ccw(c33.909,66.421) 33.816,69.019 cw(c33.836,70.493) 32.584,69.715 31.923,70.862 cw(c33.261,71.635) 33.102,73.172 34.667,72.976 cw(c34.557,71.635) 35.722,70.962 35.058,69.812 cw(c33.982,70.493) 33.909,69.221 ccw(c33.909,66.421) 33.809,69.219 cw(c33.836,70.493) 32.76,69.812 32.096,70.962 cw(c33.261,71.635) 33.151,72.976 34.624,72.779 cw(c34.557,71.635) 35.549,71.062 34.911,69.956 cw(c33.982,70.493) 33.987,69.42 ; 33.938,63.421 cw(c33.982,62.349) 33.987,63.422 ; 33.938,63.421 ccw(c33.909,66.421) 33.987,63.422 ; 33.938,69.421 cw(c33.909,66.421) 33.987,69.42 ; 33.938,69.421 ccw(c33.982,70.493) 33.987,69.42 ; 35.814,65.321 cw(c37.472,64.448) 37.434,66.321 38.748,66.321 cw(c38.748,64.375) 40.537,63.61 39.499,62.208 cw(c38.1,63.253) 36.588,62.38 35.929,63.523 cw(c37.399,64.322) 35.987,65.221 cw(c37.472,64.448) 37.429,66.121 38.748,66.121 cw(c38.748,64.375) 40.352,63.686 39.352,62.346 cw(c38.1,63.253) 36.762,62.48 36.1,63.627 cw(c37.399,64.322) 36.113,65.041 ; 36.113,65.041 ccw(c33.909,66.421) 36.161,65.121 ; 36.113,65.041 cw(c37.399,64.322) 36.161,65.121 ; 36.113,67.801 cw(c33.909,66.421) 36.161,67.721 ; 36.113,67.801 ccw(c37.399,68.52) 36.161,67.721 ; 36.161,65.121 ccw(c33.909,66.421) 36.206,65.202 cw(c37.472,64.448) 37.424,65.921 38.748,65.921 cw(c38.748,64.375) 40.159,63.744 39.207,62.487 cw(c38.1,63.253) 36.935,62.58 36.271,63.73 cw(c37.399,64.322) 36.334,65.021 ccw(c33.909,66.421) 36.382,65.109 cw(c37.472,64.448) 37.42,65.721 38.748,65.721 cw(c38.748,64.375) 39.965,63.8 39.057,62.623 cw(c38.1,63.253) 37.108,62.68 36.47,63.786 cw(c37.399,64.322) 36.467,64.854 ; 36.161,67.721 cw(c33.909,66.421) 36.206,67.64 ccw(c37.472,68.394) 37.424,66.921 38.748,66.921 ccw(c38.748,68.467) 40.159,69.098 39.207,70.355 ccw(c38.1,69.589) 36.935,70.262 36.271,69.112 ccw(c37.399,68.52) 36.334,67.821 cw(c33.909,66.421) 36.382,67.733 ccw(c37.472,68.394) 37.42,67.121 38.748,67.121 ccw(c38.748,68.467) 39.965,69.042 39.057,70.219 ccw(c38.1,69.589) 37.108,70.162 36.47,69.056 ccw(c37.399,68.52) 36.467,67.988 ; 36.467,64.854 ccw(c33.909,66.421) 36.492,64.896 ; 36.467,64.854 cw(c37.399,64.322) 36.492,64.896 ; 36.467,67.988 ccw(c37.399,68.52) 36.492,67.946 ; 36.467,67.988 cw(c33.909,66.421) 36.492,67.946 ; 36.492,64.896 ccw(c33.909,66.421) 36.507,64.921 ccw(c33.909,66.421) 36.521,64.946 ; 36.492,67.946 cw(c33.909,66.421) 36.507,67.921 cw(c33.909,66.421) 36.521,67.896 ; 36.521,64.946 cw(c37.472,64.448) 36.545,64.989 ; 36.521,64.946 ccw(c33.909,66.421) 36.545,64.989 ; 36.521,67.896 ccw(c37.472,68.394) 36.545,67.853 ; 36.521,67.896 cw(c33.909,66.421) 36.545,67.853 ; 36.812,68.191 cw(c33.909,66.421) 36.853,68.121 cw(c33.909,66.421) 36.893,68.05 ; 36.893,64.792 cw(c37.472,64.448) 37.472,65.121 38.748,65.121 cw(c38.748,64.375) 39.415,64.041 38.562,62.958 cw(c38.1,63.253) 37.606,63.018 36.989,64.086 cw(c37.399,64.322) 36.985,64.55 ; 36.893,68.05 ccw(c37.472,68.394) 37.472,67.721 38.748,67.721 ccw(c38.748,68.467) 39.415,68.801 38.562,69.884 ccw(c38.1,69.589) 37.606,69.824 36.989,68.756 ccw(c37.399,68.52) 36.985,68.292 ; 36.985,68.292 cw(c33.909,66.421) 37.027,68.221 cw(c33.909,66.421) 37.067,68.149 ; 37.067,68.149 ccw(c37.472,68.394) 37.472,67.921 38.705,67.921 ccw(c38.748,68.467) 39.235,68.719 38.384,69.786 ccw(c38.1,69.589) 37.801,69.762 37.163,68.656 ccw(c37.399,68.52) 37.158,68.392 ; 37.336,64.359 37.373,64.421 37.408,64.484 ; 37.336,68.483 37.373,68.421 37.408,68.359
  Layer 1 w0.3: 32.506,65.611 ccw(c33.909,66.421) 35.312,67.231